# EAGLE board stm32_main_0_1_noteardrop (EAGLE 5.10)
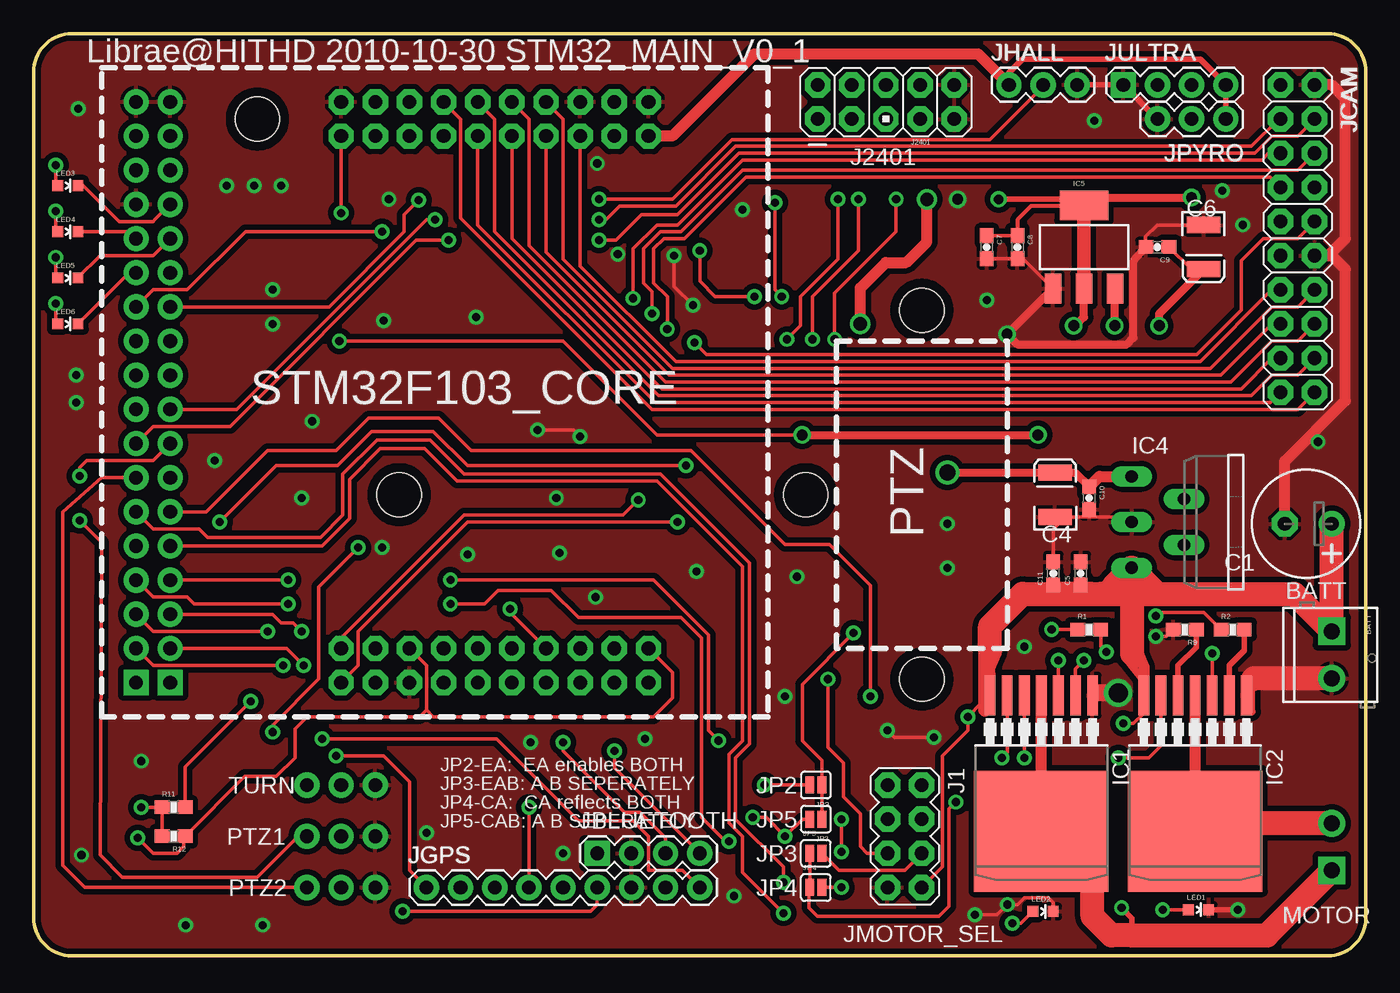
[diagram p0: board, top side]
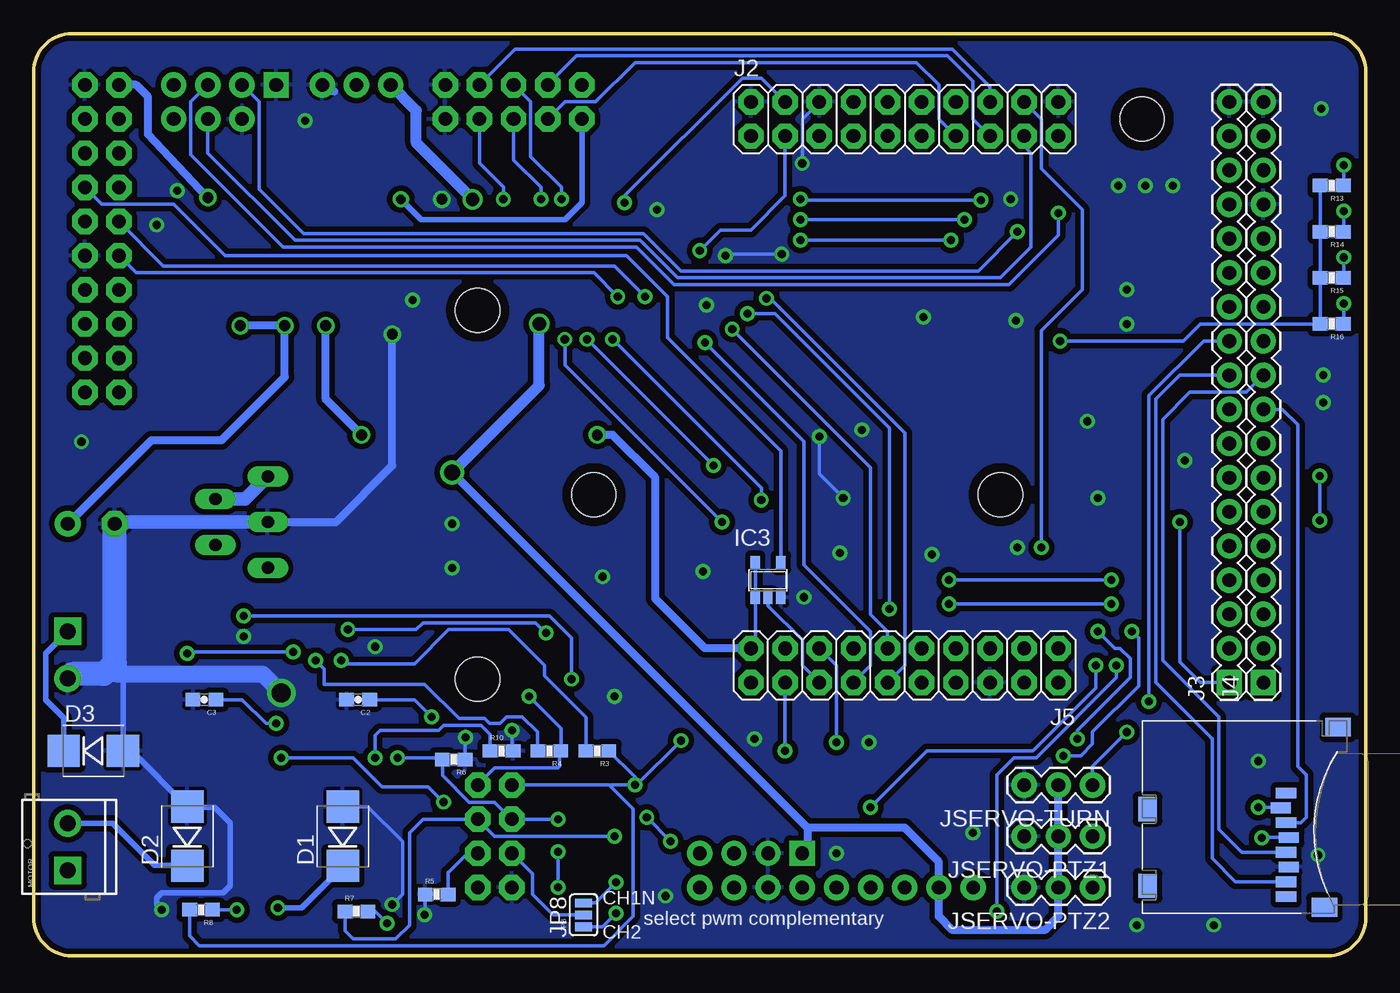
[diagram p1: board, bottom side, seen from below]

Size 99.06 x 68.58 mm. Coordinates in mm from the lower left corner, seen from the top.
Outline: 2.84,68.58 arc90 0,65.74 0,2.84 arc90 2.84,0 96.22,0 arc90 99.06,2.84 99.06,65.74 arc90 96.22,68.58 2.84,68.58
Copper layers (1*16): Top 0.035mm / dielectric 1.5mm / Bottom 0.035mm
Design rules "SparkFun": minimum track width 8mil, minimum drill 20mil, track to track 8mil, track to pad 8mil, pad to pad 8mil, via to via 8mil, smd to smd 8mil, copper to edge 10mil, drill to drill 8mil, minimum pad ring 12mil, minimum via ring 10mil, stop-mask expansion 4mil, vias tented up to drill 25mil, thermal gap 10mil

## Footprints (pad centres in the part's own frame; a part is rotated, then mirrored left to right if it is on the bottom)
SCREWTERMINAL-3.5MM-2 = drill 1.2 pad 2.032 square: 1 0,0 | drill 1.2 pad 2.032 round: 2 3.5,0
E-035X080 = drill 1.016 pad 1.93 round: + -1.905,0 | drill 1.016 pad 1.93 octagon: - 1.587,0
0603-CAP = smd 1.1 x 1: 1 -0.85,0; 2 0.85,0
EIA3528 = smd 1.2 x 2.5: A 1.65,0; C -1.65,0
SMB-DIODE = smd 2.4 x 2.4: A 2.2,0; C -2.2,0
P-TO263-7-1 = smd 0.8 x 3: 1 -3.81,-9.207; 2 -2.54,-9.207; 3 -1.27,-9.207; 4 0,-9.207; 5 1.27,-9.207; 6 2.54,-9.207; 7 3.81,-9.207 | smd 10 x 9: 8 0,0.895
SOT23-5 = smd 0.69 x 0.99: 1 -0.95,-1.29; 2 0,-1.29; 3 0.95,-1.29; 4 0.95,1.3; 5 -0.95,1.3
TO220-5 = drill 0.9 long: 1 -3.4,-8.4; 2 -1.7,-4.5; 3 0,-8.4; 4 1.7,-4.5; 5 3.4,-8.4
SOT223 = smd 1.219 x 2.235: 1 -2.311,-3.099; 2 0,-3.099; 3 2.311,-3.099 | smd 3.6 x 2.2: 4 0,3.099
2X4 = drill 1.016 pad 1.88 octagon: 1 -3.81,-1.27; 2 -3.81,1.27; 3 -1.27,-1.27; 4 -1.27,1.27; 5 1.27,-1.27; 6 1.27,1.27; 7 3.81,-1.27; 8 3.81,1.27
2X10 = drill 1.016 pad 1.88 octagon: 1 -11.43,-1.27; 2 -11.43,1.27; 3 -8.89,-1.27; 4 -8.89,1.27; 5 -6.35,-1.27; 6 -6.35,1.27; 7 -3.81,-1.27; 8 -3.81,1.27; 9 -1.27,-1.27; 10 -1.27,1.27; 11 1.27,-1.27; 12 1.27,1.27; 13 3.81,-1.27; 14 3.81,1.27; 15 6.35,-1.27; 16 6.35,1.27; 17 8.89,-1.27; 18 8.89,1.27; 19 11.43,-1.27; 20 11.43,1.27
1X18 = drill 1.016 pad 1.88 square: 1 0,0 | drill 1.016 pad 1.88 round: 2 2.54,0; 3 5.08,0; 4 7.62,0; 5 10.16,0; 6 12.7,0; 7 15.24,0; 8 17.78,0; 9 20.32,0; 10 22.86,0; 11 25.4,0; 12 27.94,0; 13 30.48,0; 14 33.02,0; 15 35.56,0; 16 38.1,0; 17 40.64,0; 18 43.18,0
AVR_ICSP = drill 1.016 pad 1.88 octagon: 1 -1.27,5.08; 2 1.27,5.08; 3 -1.27,2.54; 4 1.27,2.54; 5 -1.27,0; 6 1.27,0; 7 -1.27,-2.54; 8 1.27,-2.54; 9 -1.27,-5.08; 10 1.27,-5.08
1X04 = drill 1.016 pad 1.88 square: 1 0,0 | drill 1.016 pad 1.88 round: 2 2.54,0; 3 5.08,0; 4 7.62,0
1X09 = drill 1.016 pad 1.88 round: 1 0,0; 2 2.54,0; 3 5.08,0; 4 7.62,0; 5 10.16,0; 6 12.7,0; 7 15.24,0; 8 17.78,0; 9 20.32,0
1X03 = drill 1.016 pad 1.88 round: 1 0,0; 2 2.54,0; 3 5.08,0
STAND-OFF = hole 3.302: 0,0
SJ_2S = smd 0.635 x 1.27: 1 -0.45,0; 2 0.45,0
SJ_3_PASTE2&3 = smd 0.635 x 1.27: 1 -0.889,0; 2 0,0; 3 0.889,0
LED-0603 = smd 0.8 x 0.8: A 0,-0.75; C 0,0.75
0603-RES = smd 1.1 x 1: 1 -0.85,0; 2 0.85,0
MICROSD = smd 0.8 x 1.5: 1 -1.94,2.7; 2 -0.84,2.3; 3 0.26,2.7; 4 1.36,2.9; 5 2.46,2.7; 6 3.56,2.9; 7 4.66,2.7; 8 5.76,2.7 | smd 1.4 x 1.9: NC -6.85,6.55; NC3 6.55,5.55 | smd 1.8 x 1.4: NC1 -0.75,-7.6; NC2 4.95,-7.6

## Placement (x,y rotation side)
BATT  [SCREWTERMINAL-3.5MM-2]  96.52,24.13 270 top
C1  470uF 16V  [E-035X080]  94.61,32.13 180 top
C2  1uF 25V  [0603-CAP]  74.93,19.05 180 bottom
C3  1uF 25V  [0603-CAP]  86.36,19.05 180 bottom
C4  10uF  [EIA3528]  75.95,34.29 90 top
C5  3.3uF  [0603-CAP]  77.85,28.45 90 top
C6  10uF  [EIA3528]  87,52.7 270 top
C7  3.3uF  [0603-CAP]  70.87,52.7 270 top
C8  104  [0603-CAP]  73.15,52.7 270 top
C9  104  [0603-CAP]  83.57,52.7 180 top
C10  104  [0603-CAP]  78.49,34.04 270 top
C11  104  [0603-CAP]  75.82,28.45 90 top
D1  DIODE-ZENERSMB  [SMB-DIODE]  76.07,8.89 90 bottom
D2  DIODE-ZENERSMB  [SMB-DIODE]  87.63,8.89 90 bottom
D3  DIODE-ZENERSMB  [SMB-DIODE]  94.61,15.24 0 bottom
IC1  BTS7960  [P-TO263-7-1]  74.93,10.16 180 top
IC2  BTS7960  [P-TO263-7-1]  86.36,10.16 180 top
IC3  74LVC1G00DBV  [SOT23-5]  44.45,27.94 0 bottom
IC4  [TO220-5]  90.04,32.26 270 top
IC5  [SOT223]  78.11,52.7 0 top
J1  M04X2  [2X4]  64.77,8.89 270 top
J2  M10X2  [2X10]  34.29,62.23 0 bottom
J3  M18_  [1X18]  10.16,20.32 90 bottom
J4  M18_  [1X18]  7.62,20.32 90 bottom
J5  M10X2  [2X10]  34.29,21.59 180 bottom
J2401  M05X2PTH  [AVR_ICSP]  63.37,63.5 90 top
JBLUETOOTH  [1X04]  41.91,7.62 0 top
JCAM  M10X2  [2X10]  93.98,53.34 270 top
JGPS  M09  [1X09]  29.21,5.08 0 top
JHALL  [1X03]  72.52,64.77 0 top
JP1  STAND-OFF  [STAND-OFF]  66.04,48.01 0 top
JP2  [SJ_2S]  58.17,12.7 180 top
JP3  [SJ_2S]  58.17,10.16 180 top
JP4  [SJ_2S]  58.17,5.08 0 top
JP5  [SJ_2S]  58.17,7.62 0 top
JP6  STAND-OFF  [STAND-OFF]  66.04,20.57 0 top
JP7  STAND-OFF  [STAND-OFF]  57.4,34.29 90 top
JP8  JUMPER-32-3  [SJ_3_PASTE2&3]  58.17,3.05 90 bottom
JP9  STAND-OFF  [STAND-OFF]  27.18,34.29 0 top
JP10  STAND-OFF  [STAND-OFF]  16.64,62.23 0 top
JPYRO  [1X03]  88.65,62.23 180 top
JSERVO-PTZ1  [1X03]  20.32,8.89 180 bottom
JSERVO-PTZ2  [1X03]  20.32,5.08 180 bottom
JSERVO-TURN  [1X03]  20.32,12.7 180 bottom
JULTRA  [1X04]  81.03,64.77 0 top
LED1  [LED-0603]  86.61,3.43 270 top
LED2  [LED-0603]  75.06,3.3 270 top
LED3  [LED-0603]  2.54,57.28 270 top
LED4  [LED-0603]  2.54,53.85 270 top
LED5  [LED-0603]  2.54,50.42 270 top
LED6  [LED-0603]  2.54,46.99 270 top
MOTOR  [SCREWTERMINAL-3.5MM-2]  96.52,6.35 90 bottom
R1  10K  [0603-RES]  78.49,24.26 0 top
R2  10K  [0603-RES]  89.15,24.26 0 top
R3  10K  [0603-RES]  57.15,15.24 180 bottom
R4  10K  [0603-RES]  60.71,15.24 180 bottom
R5  634  [0603-RES]  69.09,4.57 0 bottom
R6  634  [0603-RES]  67.82,14.61 180 bottom
R7  220  [0603-RES]  75.06,3.3 0 bottom
R8  220  [0603-RES]  86.61,3.43 180 bottom
R9  1K  [0603-RES]  85.6,24.26 180 top
R10  1K  [0603-RES]  64.26,15.24 0 bottom
R11  0R  [0603-RES]  10.41,11.05 0 top
R12  10K  [0603-RES]  10.41,8.89 180 top
R13  470  [0603-RES]  2.54,57.28 180 bottom
R14  470  [0603-RES]  2.54,53.85 180 bottom
R15  470  [0603-RES]  2.54,50.42 180 bottom
R16  470  [0603-RES]  2.54,46.99 180 bottom
TF-SOCKET  SF-MICROSD  [MICROSD]  8.64,10.16 270 bottom

## Library data of the parts
BATT C2-C11 D1-D3 IC5 J1-J5 J2401 JBLUETOOTH JCAM JGPS JHALL JP1-JP10 JPYRO JSERVO-PTZ1 JSERVO-PTZ2 JSERVO-TURN JULTRA LED1-LED6 MOTOR R1-R16 = SparkFun
C1 = cap-master
IC1 IC2 = infineon
IC3 = 74xx-little-us
IC4 = linear-technology
TF-SOCKET = microsd

## Nets
3V3: C7.1 C8.1 IC3.1 IC3.5 IC5.2 IC5.4 J5.5 J5.19 J2401.1 JCAM.1 R12.1 R13.2 R14.2 R15.2 R16.2 TF-SOCKET.4
5V: C4.A C10.1 IC4.1 IC4.2 J2.1 JBLUETOOTH.1 JGPS.2 JHALL.1 JPYRO.1 JSERVO-PTZ1.2 JSERVO-PTZ2.2 JSERVO-TURN.2 JULTRA.4
2401_CE: J2.13 J2401.3
2401_CSN: J2.15 J2401.4
2401_IRQ: J2.16 J2401.8
2401_MISO: J5.2 J2401.7
2401_MOSI: J5.1 J2401.6
2401_SCK: J3.1 J2401.5
CURR-A: IC1.6 J1.3 JP4.2 R6.2
CURR-B: J1.6 JP5.2 R5.2
D0: J2.5 JCAM.13
D1: J2.8 JCAM.14
D2: J2.7 JCAM.15
D3: J2.10 JCAM.16
D4: J2.9 JCAM.17
D5: J2.12 JCAM.18
D6: J2.11 JCAM.19
D7: J2.14 JCAM.20
ECHO: J4.12 JULTRA.2
EN-A: J1.1 J3.4 JP2.2 R3.1 R8.2
EN-B: J1.4 J4.4 JP3.2 R7.1
GND: BATT.2 C1.- C2.2 C3.2 C4.C C5.2 C6.C C7.2 C8.2 C9.2 C10.2 C11.2 D1.A D2.A D3.A IC1.1 IC2.1 IC3.3 IC4.3 IC5.1 J1.7 J2.2 J2.6 J2.20 J3.18 J4.15 J4.18 J5.6 J2401.9 J2401.10 JBLUETOOTH.2 JCAM.2 JCAM.12 JGPS.7 JHALL.3 JPYRO.3 JSERVO-PTZ1.3 JSERVO-PTZ2.3 JSERVO-TURN.3 JULTRA.1 LED1.C LED2.C R5.1 R6.1 R9.2 R10.2 TF-SOCKET.6
GPLED0: J3.15 LED3.C
GPLED1: J4.14 LED4.C
GPLED2: J3.14 LED5.C
GPLED3: J4.13 LED6.C
GPS_BOOT: J3.3 JGPS.9
GPS_EN: J4.3 JGPS.1
GPS_RX_I: J4.2 JGPS.6
GPS_TX_O: J3.2 JGPS.4
HALL_OUT: J3.12 JHALL.2
M1: D1.C IC1.4 IC1.8 MOTOR.1
M2: D2.C IC2.4 IC2.8 MOTOR.2
N$1: IC2.3 R1.2
N$2: JP2.1 JP3.1 R1.1
N$3: IC2.2 R2.2
N$4: LED1.A R8.1
N$5: IC2.6 JP4.1 JP5.1
N$6: LED2.A R7.2
N$7: IC1.3 R3.2
N$8: IC1.2 R4.2
N$9: IC1.5 R10.1
N$10: IC2.5 R9.1
N$11: R11.1 R12.2 TF-SOCKET.2
N$15: LED5.A R15.1
N$16: LED4.A R14.1
N$17: LED3.A R13.1
N$18: LED6.A R16.1
OE: J5.14 JCAM.10
PA0: J3.13
PA3: J4.11
PA8: IC3.2 J5.16
PA11: J5.17
PA12: J5.20
PB12: J4.1
PD8: J5.4
PD9: J5.3
PD12: J5.8
PD13: J5.7
PD14: J5.10
PD15: J5.9
PE7: J3.7
PE10: J4.5
PWM-A: J1.2 J3.6 R4.1
PWM-B: J1.5 JP8.2 R2.1
PWM-B1: J3.5 JP8.1
PWM-B2: J4.6 JP8.3
PYRO_OUT: J2.17 JPYRO.2
RCLK: J2.4 JCAM.11
RRST: J2.3 JCAM.9
RXD: J5.18 JBLUETOOTH.4
SCL: J3.9 JCAM.3
SD_CS: J3.11 R11.2
SD_DIN: J4.9 TF-SOCKET.3
SD_DOUT: J3.10 TF-SOCKET.7
SD_SCK: J4.10 TF-SOCKET.5
SDA: J4.8 JCAM.4
SERVO_PTZ1: J3.8 JSERVO-PTZ1.1
SERVO_PTZ2: J4.7 JSERVO-PTZ2.1
SERVO_TURN: J2.18 JSERVO-TURN.1
TRIG: J2.19 JULTRA.3
TXD: J5.15 JBLUETOOTH.3
VCC: BATT.1 C1.+ C2.1 C3.1 C5.1 C6.A C9.1 C11.1 D3.C IC1.7 IC2.7 IC4.5 IC5.3 J1.8
VSYNC: J5.12 JCAM.5
WE: J5.11 JCAM.7
WRST: J5.13 JCAM.6
XCLK: IC3.4 JCAM.8

## Tracks (layer width: path | path; a pad name or v marks a point on that pad's centre or on a via)
3V3  (via drill 0.6, 0.7, 0.8)
  Top 0.254: C8.1 C7.1 | J5.5 29.21,21.59 29.21,18.29 | 29.21,18.29 29.72,17.78 46.1,17.78 47.5,19.18 47.5,21.08 J5.19 | 29.21,18.29 28.7,17.78 20.32,17.78 19.43,16.89 19.43,14.73 18.03,13.34 15.71,13.34 R12.1 11.18,8.8 11.18,8.13 10.67,7.62 8.89,7.62 v7.75,8.76 | v22.73,45.72 39.37,45.72 46.35,38.73 v57.15,38.73
  Top 0.305: C8.1 73.15,54.74 74.17,55.75 78.05,55.75 IC5.4
  Top 0.406: v71.75,56.26 78.87,56.26 78.99,56.39
  Top 0.61: 78.11,56.39 78.99,56.39 v86.11,56.39 | v57.15,38.73 v74.68,38.73 | v77.34,46.86 78.11,47.5 78.11,50.16
  Top 0.813: IC5.4 78.11,56.39
  Top 1.016: IC5.4 78.11,50.16 IC5.2
  Bottom 0.254: v22.73,45.72 13.59,45.72 12.32,46.99 R16.2 R15.2 R14.2 R13.2 | J5.19 45.4,23.18 IC3.1 IC3.5 | TF-SOCKET.4 7.71,8.8 v7.75,8.76
  Bottom 0.406: J2401.1 58.29,56.01 59.56,54.74 70.23,54.74 v71.75,56.26
  Bottom 0.61: v86.11,56.39 90.55,61.09 90.55,63.88 91.44,64.77 JCAM.1 | J5.19 49.15,22.86 52.83,26.54 52.83,35.56 56.01,38.73 v57.15,38.73 | v74.68,38.73 77.34,41.4 v77.34,46.86
5V  (via drill 1, 1.2)
  Top 0.406: C4.A | JPYRO.1 JULTRA.4 86.74,66.67 73.53,66.67 72.52,65.66 JHALL.1
  Top 0.61: C4.A 77.43,35.94 C10.1 | v67.94,35.94 C4.A
  Top 0.813: IC4.1 79.26,35.66 C10.1 | J2.1 47.5,60.96 53.59,67.06 70.23,67.06 JHALL.1 | v61.47,46.99 61.47,49.66 63.37,51.56 64.9,51.56 66.42,53.09 v66.42,56.26
  Bottom 0.61: 41.53,9.53 34.29,9.53 31.75,6.99 JGPS.2 31.75,2.92 30.73,1.91 23.88,1.91 22.86,2.92 JSERVO-PTZ2.2 JSERVO-PTZ1.2 JSERVO-TURN.2 | 41.53,9.53 v67.94,35.94 | JBLUETOOTH.1 41.53,8 41.53,9.53
  Bottom 0.813: v67.94,35.94 61.47,42.42 v61.47,46.99 | JHALL.1 70.61,62.87 70.61,60.45 v66.42,56.26
  Bottom 1.016: IC4.2 83.34,33.96 IC4.1
2401_CE
  Bottom 0.254: J2.13 31.75,62.23 31.75,64.77 33.4,66.42 54.36,66.42 57.28,63.5 59.56,63.5 J2401.3
2401_CSN
  Bottom 0.254: J2.15 29.21,62.23 29.21,65.02 31.11,66.93 58.67,66.93 J2401.4
2401_IRQ
  Bottom 0.254: J2401.8 63.25,67.44 30.73,67.44 27.94,64.64 J2.16
2401_MISO  (via drill 0.6)
  Top 0.254: v64.14,56.26 64.14,53.85 59.56,49.28 v59.56,45.85 | v47.88,32.26 32.26,32.26 24.13,24.13 24.13,21.59 J5.2
  Bottom 0.254: J2401.7 65.91,58.93 64.14,57.15 v64.14,56.26 | v59.56,45.85 59.56,43.94 v47.88,32.26
2401_MOSI  (via drill 0.6)
  Top 0.254: v59.82,56.26 59.82,51.82 57.02,49.02 57.02,46.86 v56.01,45.85 | J5.1 22.86,23.62 32,32.77 43.81,32.77 v44.96,33.91
  Bottom 0.254: J2401.6 62.1,63.5 62.1,59.44 59.82,57.15 v59.82,56.26 | v44.96,33.91 44.96,34.8 v56.01,45.85
2401_SCK  (via drill 0.6)
  Top 0.254: v61.34,56.26 61.34,52.45 57.91,49.02 v57.91,45.85 | v13.84,32.26 18.03,36.45 22.61,36.45 25.15,38.99 29.72,38.99 32.26,36.45 v48.51,36.45
  Bottom 0.254: J2401.5 63.37,59.18 61.34,57.15 v61.34,56.26 | v48.51,36.45 v57.91,45.85 | v13.84,32.26 13.84,21.84 12.32,20.32 J3.1
CURR-A  (via drill 0.6)
  Top 0.254: v72.01,14.73 72.39,15.11 IC1.6 | JP4.2 v60.07,5.08 | v60.07,7.75 v60.07,10.16
  Bottom 0.254: v72.01,14.73 69.18,14.73 R6.2 68.67,13.42 66.67,11.43 64.77,11.43 J1.3 v60.07,10.16 | v60.07,5.08 v60.07,7.75
CURR-B
  Top 0.254: JP5.2 59.89,6.35 64.77,6.35 J1.6
  Bottom 0.254: J1.6 66.8,7.62 68.2,6.22 68.24,6.22 R5.2
D0
  Top 0.254: JCAM.13 92.08,49.53 86.74,44.2 47.75,44.2 40.64,51.31 J2.5
D1
  Top 0.254: JCAM.14 93.98,48.26 92.08,48.26 87.5,43.69 47.5,43.69 39.37,51.82 39.37,62.23 J2.8
D2
  Top 0.254: JCAM.15 92.08,46.99 88.27,43.18 47.24,43.18 38.1,52.32 J2.7
D3
  Top 0.254: JCAM.16 93.98,45.72 92.08,45.72 89.03,42.67 46.99,42.67 36.83,52.83 36.83,62.23 J2.10
D4
  Top 0.254: JCAM.17 92.08,44.45 89.79,42.16 46.74,42.16 35.56,53.34 J2.9
D5
  Top 0.254: JCAM.18 93.98,43.18 92.08,43.18 90.55,41.66 46.48,41.66 34.29,53.85 34.29,62.23 J2.12
D6
  Top 0.254: JCAM.19 91.95,41.15 46.23,41.15 33.02,54.36 J2.11
D7
  Top 0.254: JCAM.20 93.98,40.64 45.97,40.64 31.75,54.86 31.75,62.23 J2.14
ECHO  (via drill 0.6)
  Top 0.254: v25.91,53.85 15.75,53.85 11.43,49.53 8.89,49.53 J4.12
  Bottom 0.254: JULTRA.2 82.3,63.5 82.3,57.02 78.99,53.72 53.72,53.72 50.93,50.93 28.83,50.93 v25.91,53.85
EN-A  (via drill 0.6)
  Top 0.254: v54.36,12.7 JP2.2 | J3.4 v18.92,27.94 | v30.99,27.94 46.1,27.94 50.16,23.88 50.16,16.76 v50.93,16
  Bottom 0.254: R8.2 87.46,1.49 86.74,0.76 56.64,0.76 54.48,2.92 54.48,10.92 56.2,12.64 | 56.2,12.64 56.26,12.7 J1.1 | v54.36,12.7 56.13,12.7 56.2,12.64 | R3.1 54.36,13.3 v54.36,12.7 | v18.92,27.94 v30.99,27.94 | v50.93,16 54.23,12.7 v54.36,12.7
EN-B  (via drill 0.6)
  Top 0.254: JP3.2 57.15,10.16 v55.88,8.89 54.48,10.29 v53.47,10.29 | J4.4 8.89,26.67 11.43,26.67 11.94,26.16 v18.92,26.16 | v30.99,26.16 33.53,26.16 34.54,27.18 38.48,27.18 40.51,25.15 48.13,25.15 49.66,23.62 49.66,10.29 51.44,8.51 v51.69,8.51
  Bottom 0.254: R7.1 75.91,1.87 75.31,1.27 72.14,1.27 71.12,2.29 71.12,9.14 70.1,10.16 J1.4 64.77,8.89 v55.88,8.89 | v18.92,26.16 v30.99,26.16 | v51.69,8.51 v53.47,10.29
GND  (via drill 0.6, 0.8, 1.4)
  Top 0.254: 77.94,32.64 76.71,32.64 | 77.94,32.64 C10.2 | 77.94,32.64 81.26,32.64 IC4.3 | 76.71,32.64 C4.C | C11.2 75.82,31.75 76.71,32.64 | C7.2 C8.2 73.55,51.85 IC5.1 | C6.C 83.56,54.35 82.68,53.47 82.68,52.74 C9.2 | LED2.C 75.82,3.31 75.82,3.94 75.44,4.32 73.66,4.32 73.15,3.81 v72.39,3.81 71.63,3.05 v69.98,3.05 | R9.2 84.24,23.75 v83.44,23.75 | v66.93,16.26 64.01,16.26 v63.5,16.76 | 90.68,20.57 90.68,19.88 IC2.1 | v37.47,39.12 40.13,39.12 v40.64,38.61 | v49.02,48.39 47.62,49.78 v47.62,52.07
  Top 0.406: JHALL.3 JULTRA.1 JPYRO.3 | v89.53,3.43 LED1.C
  Top 0.61: IC5.1 72.42,46.23 v72.39,46.23 | C9.2 81.79,51.65 81.79,45.97 81.28,45.47 73.15,45.47 v72.39,46.23 | v72.39,46.23 72.26,46.35
  Top 0.813: IC1.1 78.93,19.56 79.12,19.56 | C1.- 93.03,36.77 97.54,41.27 97.54,51.05 96.52,52.07 JCAM.12 96.27,52.07 97.54,53.34 97.54,63.75 96.52,64.77 JCAM.2
  Top 1.27: v80.64,19.56 79.12,19.56
  Top 1.778: BATT.2 90.73,20.63 90.68,20.57
  Bottom 0.254: v72.39,3.81 71.63,4.57 71.63,8.51 74.21,11.09 D1.A 75.78,11.38 | v83.44,23.75 83.31,23.75 | R5.1 69.94,3.09 v69.98,3.05 | 63.5,15.24 R10.2 63.5,15.33 v63.5,16.76 | R6.1 66.97,16.22 v66.93,16.26 | v40.64,38.61 40.64,35.81 v38.86,34.04 | J2.6 41.91,62.23 v41.91,58.93 | v47.62,52.07 47.5,52.2 v43.43,52.2
  Bottom 0.406: 92.42,20.53 D3.A 91.78,15.24 D2.A 87.59,11.05 85.6,11.05 84.45,9.91 84.45,5.21 84.96,4.7 89.53,4.7 89.92,4.32 89.92,3.81 v89.53,3.43
  Bottom 0.61: v72.39,46.23 72.39,36.45 76.58,32.26 IC4.3 | 92.42,20.53 92.84,20.95 | JHALL.3 76.71,64.26
  Bottom 1.016: 93,32.13 C1.- 92.9,32.26 IC4.3
  Bottom 1.27: v80.64,19.56 82.04,20.95 92.84,20.95 93.85,20.95
  Bottom 1.778: C1.- 93.03,21.78 93.85,20.95 96.19,20.95 BATT.2
  other vias: 68.71,56.26 17.78,49.53 17.78,46.99 13.46,36.83 26.04,47.24 8,14.48 73.66,22.99 29.21,9.14 39.37,7.62 25.91,30.35 26.42,56.26 41.78,26.67 52.7,55.5 3.56,7.49 19.94,34.04 56.77,28.19 55.88,19.3 32.26,29.84 39.12,29.97 49.28,28.57 16.38,57.28 18.41,57.28 14.35,57.28 3.3,62.99 3.17,43.18 3.17,41.15 11.3,2.29 17.02,2.29 52.07,4.45 67.94,32.13 67.94,28.83 95.5,38.23 78.87,62.1 70.87,48.77 32.89,47.5 20.7,39.75 89.92,54.36 88.39,56.9 36.96,15.88 45.47,16.13
  pour Top (isolate 0.406): 0,66.04 0,2.54 arc90 2.54,0 96.52,0 arc90 99.06,2.54 99.06,66.04 arc90 96.52,68.58 2.54,68.58 arc90
  pour Bottom (isolate 0.406): 0,66.04 0,2.54 arc90 2.54,0 96.52,0 arc90 99.06,2.54 99.06,66.04 arc90 96.52,68.58 2.54,68.58 arc90
GPLED0
  Top 0.254: J3.15 9.02,54.74 8.89,54.61 6.35,54.61 3.68,57.28 LED3.C
GPLED1
  Top 0.254: LED4.C 7.11,53.85 J4.14
GPLED2
  Top 0.254: LED5.C 4.94,52.07 8.89,52.07 J3.14
GPLED3
  Top 0.254: LED6.C 7.1,50.8 J4.13
GPS_BOOT  (via drill 0.6)
  Top 0.254: J3.3 17.78,25.4 18.41,24.77 19.3,24.77 v19.94,24.13 | v21.46,16.13 34.42,16.13 40.51,10.03 44.58,10.03 45.72,8.89 45.72,6.35 48.26,6.35 JGPS.9
  Bottom 0.254: v19.94,24.13 18.67,22.86 18.29,22.86 17.53,22.1 17.53,20.7 21.46,16.76 v21.46,16.13
GPS_EN  (via drill 0.6)
  Top 0.254: J4.3 8.89,24.13 v17.4,24.13 | v22.48,14.86 26.04,14.86 27.94,12.95 27.94,6.35 JGPS.1
  Bottom 0.254: v17.4,24.13 16.89,23.62 16.89,20.07 20.32,16.64 20.32,15.75 21.21,14.86 v22.48,14.86
GPS_RX_I  (via drill 0.6)
  Top 0.254: J4.2 8.89,21.59 v18.54,21.59 | v27.43,3.3 41.4,3.3 41.91,3.81 JGPS.6
  Bottom 0.254: v18.54,21.59 18.54,20.7 24.51,14.73 26.16,14.73 27.43,13.46 v27.43,3.3
GPS_TX_O  (via drill 0.6)
  Top 0.254: J3.2 18.8,22.86 v20.07,21.59 | v36.83,11.05 JGPS.4
  Bottom 0.254: v20.07,21.59 20.07,19.94 24.77,15.24 32.64,15.24 v36.83,11.05
HALL_OUT  (via drill 0.6)
  Top 0.254: J3.12 21.97,48.26 27.56,53.85 27.56,55.12 v28.64,56.2 | JHALL.2 75.06,64.64 71.12,60.71 51.94,60.71 47.5,56.26 v42.04,56.26
  Bottom 0.254: v42.04,56.26 41.97,56.2 v28.64,56.2
M1  (via drill 0.6)
  Top 0.406: v80.9,3.56 81.66,2.79 81.66,1.52
  Top 0.813: IC1.8 IC1.4
  Top 1.778: MOTOR.1 91.69,1.52 81.66,1.52 80.14,1.52 78.74,2.92 78.74,5.71 75.19,9.27 IC1.8
  Bottom 0.406: v80.9,3.56 79.12,3.56 76.07,6.6 D1.C
M2
  Top 0.813: 86.94,9.85 86.36,10.44 IC2.4
  Top 1.778: IC2.8 86.94,9.85 MOTOR.2
  Bottom 0.406: 87.67,6.73 90.04,6.73 93.16,9.85 MOTOR.2
  Bottom 1.778: D2.C 87.67,6.73
N$1  (via drill 0.6)
  Top 0.254: R1.2 79.34,23.03 v79.76,22.61 | v87.63,22.48 IC2.3
  Bottom 0.254: v79.76,22.61 87.5,22.61 v87.63,22.48
N$2  (via drill 0.6)
  Top 0.254: JP3.1 JP2.1 58.62,14.54 57.15,16 57.15,20.19 v60.96,24 | v75.69,24.26 R1.1
  Bottom 0.254: v75.69,24.26 70.61,24.26 70.1,24.77 61.72,24.77 v60.96,24
N$3
  Top 0.406: R2.2 90,22.69 88.9,21.59 IC2.2
N$4  (via drill 0.6)
  Top 0.254: LED1.A v83.95,3.43
  Bottom 0.254: v83.95,3.43 R8.1
N$5  (via drill 0.6)
  Top 0.254: JP5.1 JP4.1 57.66,5.02 57.66,3.56 58.29,2.92 67.31,2.92 68.07,3.68 68.07,10.92 v68.58,11.43 | IC2.6 83.82,15.62 82.93,14.73 v80.64,14.73
  Bottom 0.254: v80.64,14.73 75.31,14.73 73.15,12.57 69.72,12.57 v68.58,11.43
N$6  (via drill 0.6)
  Top 0.254: v72.77,2.41 73.42,2.41 LED2.A
  Bottom 0.254: R7.2 73.66,3.3 v72.77,2.41
N$7  (via drill 0.6)
  Top 0.254: v76.2,21.97 IC1.3
  Bottom 0.254: v76.2,21.97 75.95,21.72 70.74,21.72 68.2,24.26 63.75,24.26 61.09,21.59 61.09,20.83 58,17.74 R3.2
N$8  (via drill 0.6)
  Top 0.254: v78.11,21.97 77.47,21.34 IC1.2
  Bottom 0.254: R4.2 61.59,16.04 61.59,16.64 62.74,17.78 63.88,17.78 64.39,17.27 65.15,17.27 65.53,17.65 67.44,17.65 69.98,20.19 77.47,20.19 77.47,21.34 v78.11,21.97
N$9  (via drill 0.6)
  Top 0.254: v73.66,14.73 IC1.5
  Bottom 0.254: v73.66,14.73 73.66,16.38 73.28,16.76 68.96,16.76 68.58,17.14 65.79,17.14 65.11,16.47 R10.1
N$10
  Top 0.406: R9.1 86.45,22.95 85.09,21.59 IC2.5
N$11  (via drill 0.6)
  Top 0.254: v8,11.05 R11.1 R12.2
  Bottom 0.254: TF-SOCKET.2 6.38,11.05 v8,11.05
N$12
  Top 1.016: 70.74,18.29 70.74,22.61
N$13
  Top 0.254: 82.8,21.59 82.3,22.86
N$14
  Top 0.61: 90.55,18.16 90.55,20.7
N$15  (via drill 0.6)
  Top 0.254: v1.65,51.94 1.65,50.56 LED5.A
  Bottom 0.254: R15.1 1.65,50.46 v1.65,51.94
N$16  (via drill 0.6)
  Top 0.254: v1.65,55.37 1.65,53.99 LED4.A
  Bottom 0.254: R14.1 1.65,53.89 v1.65,55.37
N$17  (via drill 0.6)
  Top 0.254: v1.65,58.8 1.65,57.42 LED3.A
  Bottom 0.254: R13.1 1.65,57.32 v1.65,58.8
N$18  (via drill 0.6)
  Top 0.254: v1.65,48.51 1.65,47.13 LED6.A
  Bottom 0.254: R16.1 1.65,47.03 v1.65,48.51
OE  (via drill 0.6)
  Top 0.254: JCAM.10 93.98,53.34 91.44,53.34 89.79,51.69 89.79,48.01 86.49,44.7 50.04,44.7 v49.15,45.59
  Bottom 0.254: J5.14 36.83,21.59 36.83,24.13 41.78,29.08 41.78,38.23 v49.15,45.59
PA8
  Bottom 0.254: IC3.2 44.45,26.04 41.91,23.5 41.91,21.59 J5.16
PWM-A  (via drill 0.6)
  Top 0.254: v62.23,19.3 62.23,27.56 59.18,30.61 55.88,30.61 48.9,37.59 32.51,37.59 30.1,40.01 24.89,40.01 22.48,37.59 17.4,37.59 12.83,33.02 J3.6
  Bottom 0.254: J1.2 64.77,13.97 60.07,13.97 59.94,14.1 59.94,15.15 R4.1 59.86,16.93 v62.23,19.3
PWM-B  (via drill 0.6)
  Top 0.254: R2.1 88.27,24.26 87,25.53 83.69,25.53 v83.44,25.27 | J1.5 61.98,7.62 61.47,8.13 61.47,10.54 60.2,11.81 60.2,14.35 59.05,15.49 v59.05,20.57
  Bottom 0.254: v83.44,25.27 60.71,25.27 59.05,23.62 v59.05,20.57 | JP8.2 60.45,3.05 61.98,4.57 61.98,6.1 J1.5
PWM-B1  (via drill 0.6)
  Top 0.254: v55.75,3.17 52.7,6.22 52.7,8.89 51.69,9.91 51.69,14.99 52.7,16 52.7,28.96 46.35,35.31 31.5,35.31 29.08,37.72 25.78,37.72 23.5,35.43 23.5,32.51 21.46,30.48 J3.5
  Bottom 0.254: JP8.1 56.77,2.16 v55.75,3.17
PWM-B2  (via drill 0.6)
  Top 0.254: J4.6 8.89,31.75 12.32,31.75 12.95,31.11 21.34,31.11 22.99,32.77 22.99,35.81 25.53,38.35 29.46,38.35 32,35.81 46.61,35.81 53.21,29.21 53.21,15.75 52.2,14.73 52.2,10.16 55.75,6.6 v55.75,5.46
  Bottom 0.254: JP8.3 57.28,3.94 v55.75,5.46
PYRO_OUT
  Bottom 0.254: JPYRO.2 86.11,59.69 79.63,53.21 53.98,53.21 51.18,50.42 27.18,50.42 24.89,52.7 24.89,59.69 25.4,60.2 J2.17
RCLK  (via drill 0.6)
  Top 0.254: v55.12,56.01 55.12,49.53 v55.63,49.02
  Bottom 0.254: J2.4 44.96,65.28 46.35,65.28 55.12,56.52 v55.12,56.01 | v55.63,49.02 57.4,50.8 91.44,50.8 JCAM.11
RRST  (via drill 0.6)
  Top 0.254: v53.59,49.02 50.67,49.02 49.53,50.16 v49.53,52.45
  Bottom 0.254: v53.59,49.02 55.88,51.31 89.41,51.31 JCAM.9 | J2.3 43.18,56.52 45.72,53.98 48.01,53.98 v49.53,52.45
RXD  (via drill 0.6)
  Top 0.254: JBLUETOOTH.4 43.18,13.97 v43.18,15.24
  Bottom 0.254: v43.18,15.24 J5.18
SCL  (via drill 0.6)
  Top 0.254: J3.9 15.11,40.64 29.21,54.74 v29.84,54.74 | JCAM.3 92.58,62.23 90.55,60.2 52.2,60.2 47.75,55.75 43.56,55.75 42.55,54.74 v42.04,54.74
  Bottom 0.254: v29.84,54.74 v42.04,54.74
SD_CS  (via drill 0.6)
  Top 0.254: R11.2 11.26,14.06 v16.13,18.92
  Bottom 0.254: v16.13,18.92 16.13,41.66 12.06,45.72 J3.11
SD_DIN
  Bottom 0.254: TF-SOCKET.3 4.83,9.9 4.45,10.29 4.45,13.46 5.08,14.1 5.08,39.5 6.22,40.64 J4.9
SD_DOUT
  Bottom 0.254: TF-SOCKET.7 9.69,5.5 11.43,7.24 11.43,16.13 15.62,20.32 15.62,41.4 13.84,43.18 J3.10
SD_SCK
  Bottom 0.254: TF-SOCKET.5 9.22,7.7 10.92,9.4 10.92,17.78 15.11,21.97 15.11,39.88 13.08,41.91 8.89,41.91 J4.10
SDA  (via drill 0.6)
  Top 0.254: J4.8 8.89,39.37 14.61,39.37 28.45,53.21 v30.86,53.21 | JCAM.4 93.98,60.96 92.08,60.96 90.81,59.69 52.45,59.69 47.88,55.12 45.21,55.12 43.31,53.21 v42.04,53.21
  Bottom 0.254: v30.86,53.21 v42.04,53.21
SERVO_PTZ1  (via drill 0.6)
  Top 0.254: JSERVO-PTZ1.1 19.68,8.89 16.64,5.84 6.6,5.84 4.95,7.49 5.08,30.73 v3.43,32.38 | v3.43,35.69 3.43,36.32 3.94,36.83 8.89,36.83 J3.8
  Bottom 0.254: v3.43,32.38 v3.43,35.69
SERVO_PTZ2
  Top 0.254: J4.7 5.08,35.56 2.16,33.02 2.16,6.73 3.81,5.08 JSERVO-PTZ2.1
SERVO_TURN  (via drill 0.6)
  Top 0.254: v24.13,30.35 21.21,27.43 21.21,20.57 17.78,17.14 v17.78,16.64
  Bottom 0.254: JSERVO-TURN.1 20.32,14.1 v17.78,16.64 | J2.18 24.13,62.23 24.13,58.55 21.08,55.5 21.08,49.53 24.13,46.48 v24.13,30.35
TRIG  (via drill 0.6)
  Top 0.254: v22.86,55.24 J2.19
  Bottom 0.254: JULTRA.3 87.38,63.5 87.38,59.56 80.52,52.7 54.23,52.7 51.44,49.91 26.54,49.91 22.86,53.59 v22.86,55.24
TXD  (via drill 0.6)
  Top 0.254: v39.37,15.88 39.37,15.24 43.94,10.67 45.09,10.67 46.99,8.76 JBLUETOOTH.3
  Bottom 0.254: v39.37,15.88 39.37,21.59 J5.15
VCC  (via drill 0.6, 0.8)
  Top 0.254: C6.A 86.07,51.05 C9.1 | 70.48,19.05 70.36,19.05 | 70.48,19.05 70.8,19.37 IC1.7 | v81.03,17.27 81.79,17.27 82.55,18.03 IC2.7 | J1.8 67.56,6.6 67.56,14.86 69.47,16.76 v69.47,17.78 70.48,18.8 70.48,19.05
  Top 0.406: C11.1 C5.1 78.7,27.6 79.38,26.92 | 71.12,20.95 71.75,22.48
  Top 0.61: 82.55,20.45 81.15,22.23 | C6.A 83.69,47.75 v83.69,46.86 | IC5.3 80.39,49.58 v80.39,46.86
  Top 0.813: IC1.7 71.12,20.95 71.12,22.73 | IC2.7 82.55,20.45 82.55,21.59 81.66,22.48
  Top 1.016: 81.64,28.85 IC4.5 | BATT.1 96.9,23.75
  Top 1.778: C1.+ BATT.1 93.73,26.92 83.57,26.92 | 80.75,27.96 80.38,27.6 | 80.75,27.96 IC4.5 81.66,28.84 81.66,22.48 | 83.57,26.92 81.64,28.85 | 71.12,22.73 71.12,24.51 73.53,26.92 79.38,26.92 79.76,26.92 | 79.76,26.92 80.75,27.92 80.75,27.96 | 79.76,26.92 83.57,26.92
  Bottom 0.254: C3.1 83.57,19.05 81.79,17.27 v81.03,17.27 | 70.36,18.67 v69.47,17.78 70.74,19.05 C2.1
  Bottom 0.406: D3.C 96.81,17.69 98.17,19.05 98.17,22.48 BATT.1
  Bottom 0.61: C1.+ 90.3,38.35 85.09,38.35 80.39,43.05 v80.39,46.86 v83.69,46.86
VSYNC  (via drill 0.6)
  Top 0.254: JCAM.5 91.82,59.69 91.31,59.18 52.7,59.18 47.88,54.36 46.35,54.36 44.58,52.58 v44.58,48.9
  Bottom 0.254: J5.12 34.29,21.59 34.29,38.86 44.32,48.9 v44.58,48.9
WE  (via drill 0.6)
  Top 0.254: JCAM.7 91.95,57.91 52.96,57.91 48.39,53.34 46.86,53.34 46.1,52.58 46.1,50.04 47.12,49.02 v47.12,46.61
  Bottom 0.254: J5.11 35.56,24.13 36.83,25.4 36.83,36.32 v47.12,46.61
WRST  (via drill 0.6)
  Top 0.254: JCAM.6 93.98,58.42 52.7,58.42 48.13,53.85 46.61,53.85 45.34,52.58 45.34,50.04 45.97,49.4 v45.97,47.75 | v35.43,25.78 35.43,25.53 J5.13
  Bottom 0.254: v45.97,47.75 43.94,47.75 35.43,39.24 v35.43,25.78
XCLK
  Bottom 0.254: JCAM.8 93.98,55.88 88.65,55.88 84.84,52.07 54.99,52.07 51.94,49.02 51.94,45.97 43.5,37.53 IC3.4

## Text on the board
tPlace: JHALL | JULTRA | Librae@HITHD 2010-10-30 STM32_MAIN_V0_1 | JCAM | J2401 | JPYRO | STM32F103_CORE | PTZ | BATT | JP2-EA: EA enables BOTH | TURN | JP3-EAB: A B SEPERATELY | JP2 | JP4-CA: CA reflects BOTH | JP5-CAB: A B SEPERATELY | JP5 | PTZ1 | JGPS | JP3 | PTZ2 | JP4 | MOTOR | JMOTOR_SEL
bPlace: CH1N | JP8 | select pwm complementary | CH2